# EAGLE board panel (EAGLE 6.3)
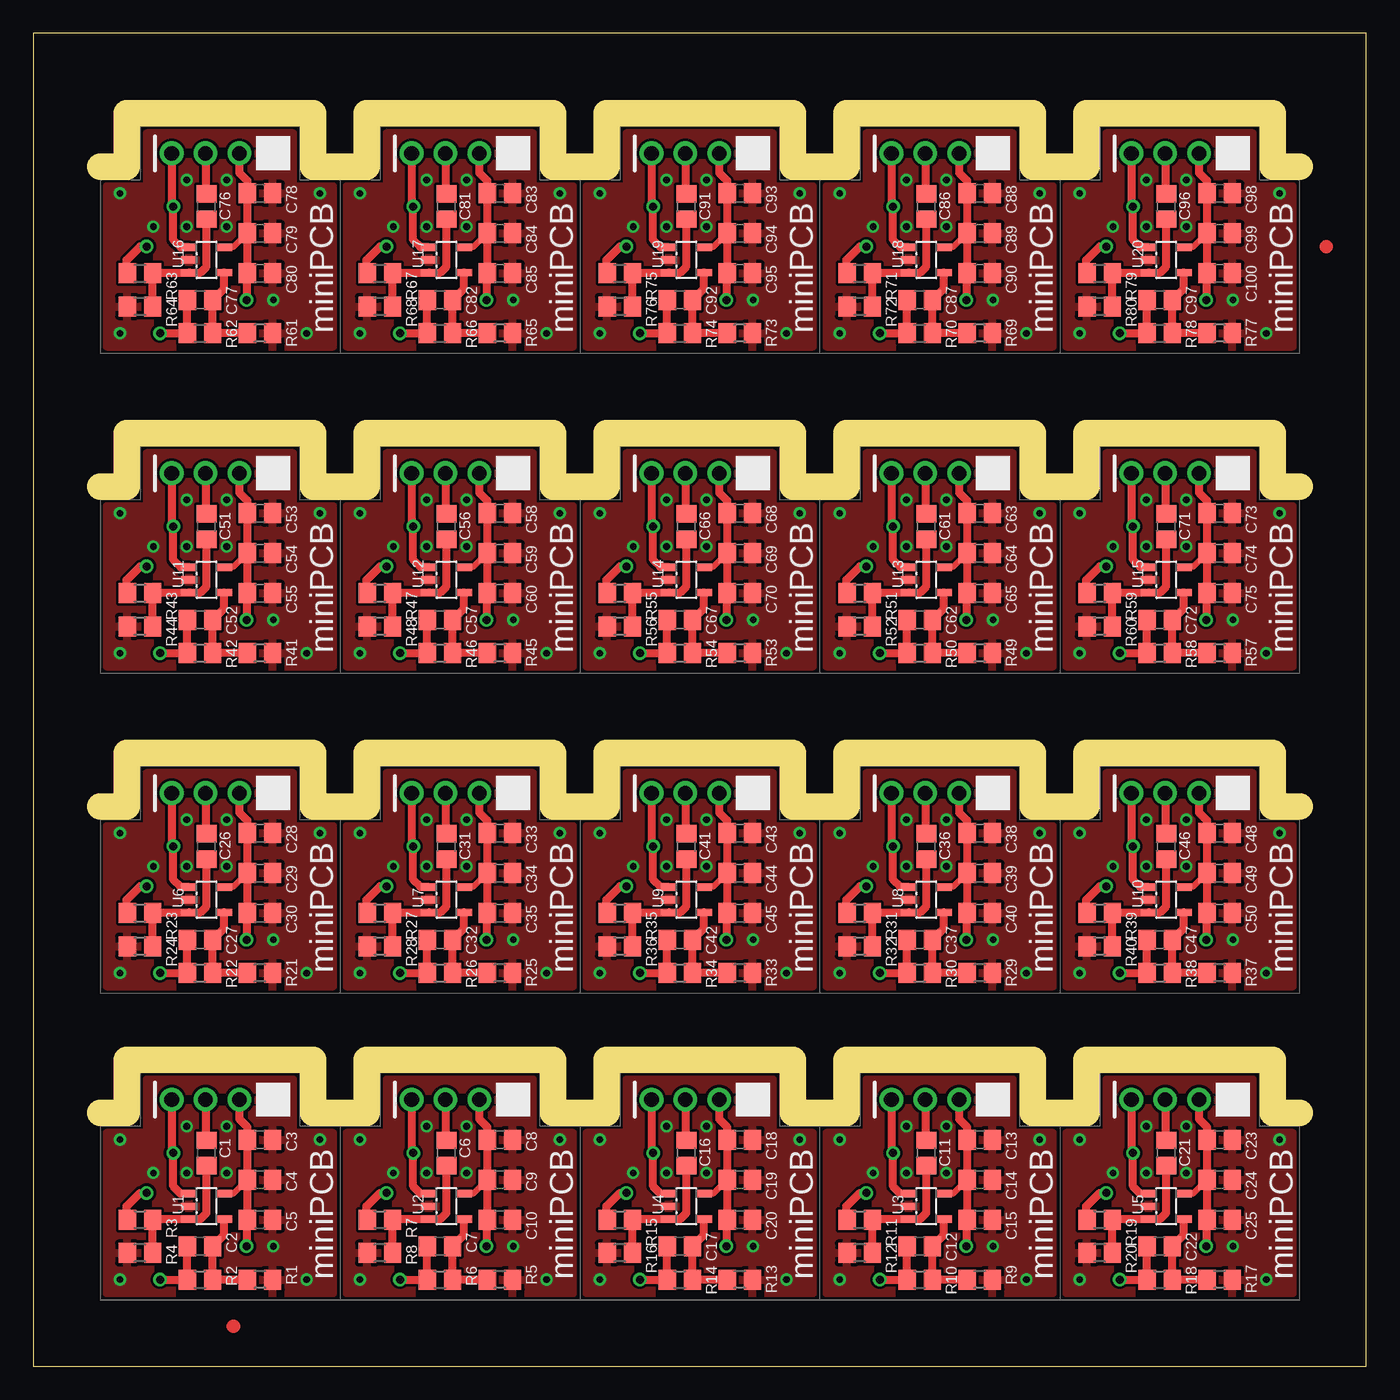
[diagram p0: board, top side]
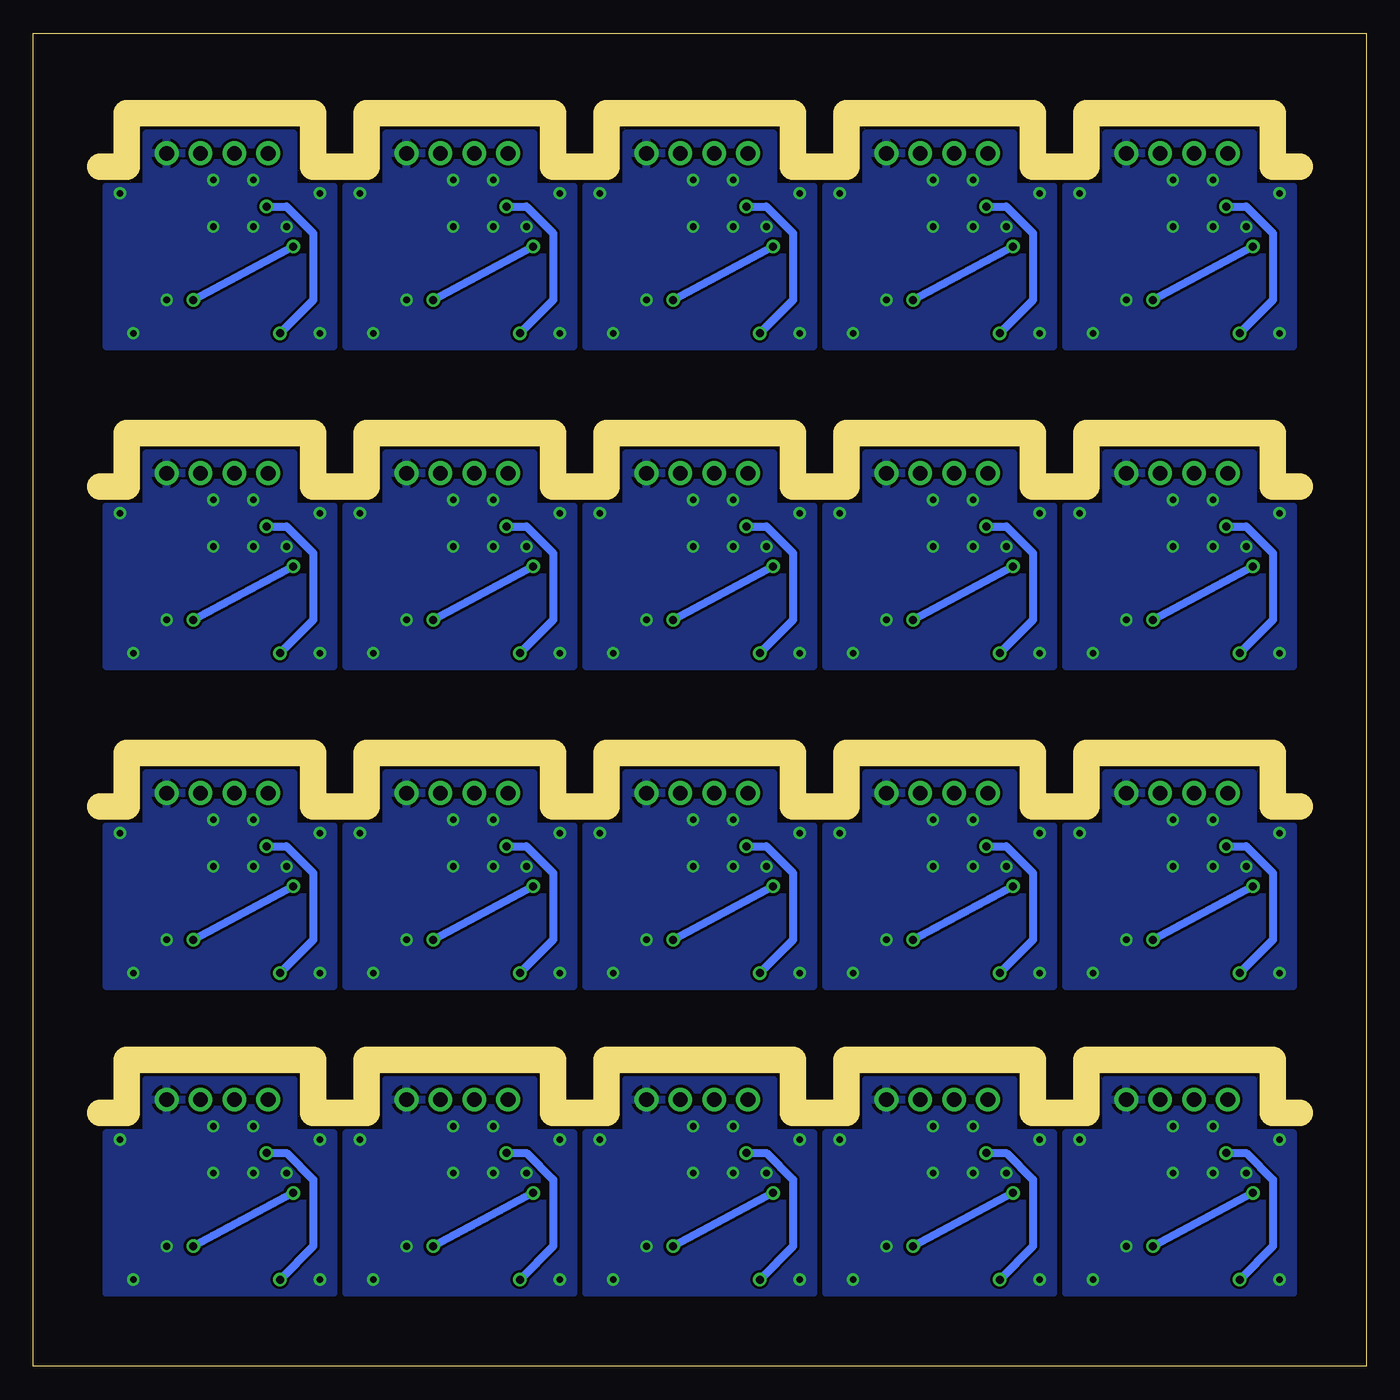
[diagram p1: board, bottom side, seen from below]

Size 100 x 100 mm. Coordinates in mm from the lower left corner, seen from the top.
Outline: 0,0 100,0 100,100 0,100 0,0
Copper layers (1*16): Top 0.035mm / dielectric 1.5mm / Bottom 0.035mm
Design rules "default *": minimum track width 10mil, minimum drill 24mil, track to track 8mil, track to pad 8mil, pad to pad 8mil, via to via 8mil, smd to smd 8mil, copper to edge 40mil, drill to drill 8mil, minimum pad ring 10mil, minimum via ring 8mil, stop-mask expansion 4mil, vias tented up to drill 20mil, thermal gap 10mil
Milling: 100 lines

## Footprints (pad centres in the part's own frame; a part is rotated, then mirrored left to right if it is on the bottom)
C0805 = smd 1.3 x 1.5: 1 -0.95,0; 2 0.95,0
FIDUCIAL = smd 0 x 0: FIDUCIAL 0,0
PCB_4 = drill 1.1 pad 1.778: P$1 0,0; P$2 0,-2.54; P$3 0,-5.08; P$4 0,-7.62
R0805 = smd 1.3 x 1.5: 1 -0.95,0; 2 0.95,0
SOT23-5 = smd 0.55 x 1.2: 1 -0.95,-1.3; 2 0,-1.3; 3 0.95,-1.3; 4 0.95,1.3; 5 -0.95,1.3

## Placement (x,y rotation side)
C1  [C0805]  13,16 270 top
C2  [C0805]  12.5,9 0 top
C3  [C0805]  17,17 180 top
C4  [C0805]  17,14 180 top
C5  [C0805]  17,11 180 top
C6  [C0805]  31,16 270 top
C7  [C0805]  30.5,9 0 top
C8  [C0805]  35,17 180 top
C9  [C0805]  35,14 180 top
C10  [C0805]  35,11 180 top
C11  [C0805]  67,16 270 top
C12  [C0805]  66.5,9 0 top
C13  [C0805]  71,17 180 top
C14  [C0805]  71,14 180 top
C15  [C0805]  71,11 180 top
C16  [C0805]  49,16 270 top
C17  [C0805]  48.5,9 0 top
C18  [C0805]  53,17 180 top
C19  [C0805]  53,14 180 top
C20  [C0805]  53,11 180 top
C21  [C0805]  85,16 270 top
C22  [C0805]  84.5,9 0 top
C23  [C0805]  89,17 180 top
C24  [C0805]  89,14 180 top
C25  [C0805]  89,11 180 top
C26  [C0805]  13,39 270 top
C27  [C0805]  12.5,32 0 top
C28  [C0805]  17,40 180 top
C29  [C0805]  17,37 180 top
C30  [C0805]  17,34 180 top
C31  [C0805]  31,39 270 top
C32  [C0805]  30.5,32 0 top
C33  [C0805]  35,40 180 top
C34  [C0805]  35,37 180 top
C35  [C0805]  35,34 180 top
C36  [C0805]  67,39 270 top
C37  [C0805]  66.5,32 0 top
C38  [C0805]  71,40 180 top
C39  [C0805]  71,37 180 top
C40  [C0805]  71,34 180 top
C41  [C0805]  49,39 270 top
C42  [C0805]  48.5,32 0 top
C43  [C0805]  53,40 180 top
C44  [C0805]  53,37 180 top
C45  [C0805]  53,34 180 top
C46  [C0805]  85,39 270 top
C47  [C0805]  84.5,32 0 top
C48  [C0805]  89,40 180 top
C49  [C0805]  89,37 180 top
C50  [C0805]  89,34 180 top
C51  [C0805]  13,63 270 top
C52  [C0805]  12.5,56 0 top
C53  [C0805]  17,64 180 top
C54  [C0805]  17,61 180 top
C55  [C0805]  17,58 180 top
C56  [C0805]  31,63 270 top
C57  [C0805]  30.5,56 0 top
C58  [C0805]  35,64 180 top
C59  [C0805]  35,61 180 top
C60  [C0805]  35,58 180 top
C61  [C0805]  67,63 270 top
C62  [C0805]  66.5,56 0 top
C63  [C0805]  71,64 180 top
C64  [C0805]  71,61 180 top
C65  [C0805]  71,58 180 top
C66  [C0805]  49,63 270 top
C67  [C0805]  48.5,56 0 top
C68  [C0805]  53,64 180 top
C69  [C0805]  53,61 180 top
C70  [C0805]  53,58 180 top
C71  [C0805]  85,63 270 top
C72  [C0805]  84.5,56 0 top
C73  [C0805]  89,64 180 top
C74  [C0805]  89,61 180 top
C75  [C0805]  89,58 180 top
C76  [C0805]  13,87 270 top
C77  [C0805]  12.5,80 0 top
C78  [C0805]  17,88 180 top
C79  [C0805]  17,85 180 top
C80  [C0805]  17,82 180 top
C81  [C0805]  31,87 270 top
C82  [C0805]  30.5,80 0 top
C83  [C0805]  35,88 180 top
C84  [C0805]  35,85 180 top
C85  [C0805]  35,82 180 top
C86  [C0805]  67,87 270 top
C87  [C0805]  66.5,80 0 top
C88  [C0805]  71,88 180 top
C89  [C0805]  71,85 180 top
C90  [C0805]  71,82 180 top
C91  [C0805]  49,87 270 top
C92  [C0805]  48.5,80 0 top
C93  [C0805]  53,88 180 top
C94  [C0805]  53,85 180 top
C95  [C0805]  53,82 180 top
C96  [C0805]  85,87 270 top
C97  [C0805]  84.5,80 0 top
C98  [C0805]  89,88 180 top
C99  [C0805]  89,85 180 top
C100  [C0805]  89,82 180 top
E$1  [FIDUCIAL]  15,3 0 top
E$2  [FIDUCIAL]  97,84 0 top
J1  PINS_4SILK  [PCB_4]  18,20 270 top
J2  PINS_4SILK  [PCB_4]  36,20 270 top
J3  PINS_4SILK  [PCB_4]  72,20 270 top
J4  PINS_4SILK  [PCB_4]  54,20 270 top
J5  PINS_4SILK  [PCB_4]  90,20 270 top
J6  PINS_4SILK  [PCB_4]  18,43 270 top
J7  PINS_4SILK  [PCB_4]  36,43 270 top
J8  PINS_4SILK  [PCB_4]  72,43 270 top
J9  PINS_4SILK  [PCB_4]  54,43 270 top
J10  PINS_4SILK  [PCB_4]  90,43 270 top
J11  PINS_4SILK  [PCB_4]  18,67 270 top
J12  PINS_4SILK  [PCB_4]  36,67 270 top
J13  PINS_4SILK  [PCB_4]  72,67 270 top
J14  PINS_4SILK  [PCB_4]  54,67 270 top
J15  PINS_4SILK  [PCB_4]  90,67 270 top
J16  PINS_4SILK  [PCB_4]  18,91 270 top
J17  PINS_4SILK  [PCB_4]  36,91 270 top
J18  PINS_4SILK  [PCB_4]  72,91 270 top
J19  PINS_4SILK  [PCB_4]  54,91 270 top
J20  PINS_4SILK  [PCB_4]  90,91 270 top
R1  [R0805]  17,6.5 180 top
R2  [R0805]  12.5,6.5 0 top
R3  [R0805]  8,11 0 top
R4  [R0805]  8,8.5 180 top
R5  [R0805]  35,6.5 180 top
R6  [R0805]  30.5,6.5 0 top
R7  [R0805]  26,11 0 top
R8  [R0805]  26,8.5 180 top
R9  [R0805]  71,6.5 180 top
R10  [R0805]  66.5,6.5 0 top
R11  [R0805]  62,11 0 top
R12  [R0805]  62,8.5 180 top
R13  [R0805]  53,6.5 180 top
R14  [R0805]  48.5,6.5 0 top
R15  [R0805]  44,11 0 top
R16  [R0805]  44,8.5 180 top
R17  [R0805]  89,6.5 180 top
R18  [R0805]  84.5,6.5 0 top
R19  [R0805]  80,11 0 top
R20  [R0805]  80,8.5 180 top
R21  [R0805]  17,29.5 180 top
R22  [R0805]  12.5,29.5 0 top
R23  [R0805]  8,34 0 top
R24  [R0805]  8,31.5 180 top
R25  [R0805]  35,29.5 180 top
R26  [R0805]  30.5,29.5 0 top
R27  [R0805]  26,34 0 top
R28  [R0805]  26,31.5 180 top
R29  [R0805]  71,29.5 180 top
R30  [R0805]  66.5,29.5 0 top
R31  [R0805]  62,34 0 top
R32  [R0805]  62,31.5 180 top
R33  [R0805]  53,29.5 180 top
R34  [R0805]  48.5,29.5 0 top
R35  [R0805]  44,34 0 top
R36  [R0805]  44,31.5 180 top
R37  [R0805]  89,29.5 180 top
R38  [R0805]  84.5,29.5 0 top
R39  [R0805]  80,34 0 top
R40  [R0805]  80,31.5 180 top
R41  [R0805]  17,53.5 180 top
R42  [R0805]  12.5,53.5 0 top
R43  [R0805]  8,58 0 top
R44  [R0805]  8,55.5 180 top
R45  [R0805]  35,53.5 180 top
R46  [R0805]  30.5,53.5 0 top
R47  [R0805]  26,58 0 top
R48  [R0805]  26,55.5 180 top
R49  [R0805]  71,53.5 180 top
R50  [R0805]  66.5,53.5 0 top
R51  [R0805]  62,58 0 top
R52  [R0805]  62,55.5 180 top
R53  [R0805]  53,53.5 180 top
R54  [R0805]  48.5,53.5 0 top
R55  [R0805]  44,58 0 top
R56  [R0805]  44,55.5 180 top
R57  [R0805]  89,53.5 180 top
R58  [R0805]  84.5,53.5 0 top
R59  [R0805]  80,58 0 top
R60  [R0805]  80,55.5 180 top
R61  [R0805]  17,77.5 180 top
R62  [R0805]  12.5,77.5 0 top
R63  [R0805]  8,82 0 top
R64  [R0805]  8,79.5 180 top
R65  [R0805]  35,77.5 180 top
R66  [R0805]  30.5,77.5 0 top
R67  [R0805]  26,82 0 top
R68  [R0805]  26,79.5 180 top
R69  [R0805]  71,77.5 180 top
R70  [R0805]  66.5,77.5 0 top
R71  [R0805]  62,82 0 top
R72  [R0805]  62,79.5 180 top
R73  [R0805]  53,77.5 180 top
R74  [R0805]  48.5,77.5 0 top
R75  [R0805]  44,82 0 top
R76  [R0805]  44,79.5 180 top
R77  [R0805]  89,77.5 180 top
R78  [R0805]  84.5,77.5 0 top
R79  [R0805]  80,82 0 top
R80  [R0805]  80,79.5 180 top
U1  LMH6629/DBV  [SOT23-5]  13,12 270 top
U2  LMH6629/DBV  [SOT23-5]  31,12 270 top
U3  LMH6629/DBV  [SOT23-5]  67,12 270 top
U4  LMH6629/DBV  [SOT23-5]  49,12 270 top
U5  LMH6629/DBV  [SOT23-5]  85,12 270 top
U6  LMH6629/DBV  [SOT23-5]  13,35 270 top
U7  LMH6629/DBV  [SOT23-5]  31,35 270 top
U8  LMH6629/DBV  [SOT23-5]  67,35 270 top
U9  LMH6629/DBV  [SOT23-5]  49,35 270 top
U10  LMH6629/DBV  [SOT23-5]  85,35 270 top
U11  LMH6629/DBV  [SOT23-5]  13,59 270 top
U12  LMH6629/DBV  [SOT23-5]  31,59 270 top
U13  LMH6629/DBV  [SOT23-5]  67,59 270 top
U14  LMH6629/DBV  [SOT23-5]  49,59 270 top
U15  LMH6629/DBV  [SOT23-5]  85,59 270 top
U16  LMH6629/DBV  [SOT23-5]  13,83 270 top
U17  LMH6629/DBV  [SOT23-5]  31,83 270 top
U18  LMH6629/DBV  [SOT23-5]  67,83 270 top
U19  LMH6629/DBV  [SOT23-5]  49,83 270 top
U20  LMH6629/DBV  [SOT23-5]  85,83 270 top

## Library data of the parts
C1-C100 E$1 E$2 J1-J20 R1-R80 U1-U20 = nolan-utsa

## Nets
GND: C3.1 C4.1 C5.1 J1.P$1 R1.1 R4.2 U1.2
GND1: C8.1 C9.1 C10.1 J2.P$1 R5.1 R8.2 U2.2
GND2: C13.1 C14.1 C15.1 J3.P$1 R9.1 R12.2 U3.2
GND3: C18.1 C19.1 C20.1 J4.P$1 R13.1 R16.2 U4.2
GND4: C23.1 C24.1 C25.1 J5.P$1 R17.1 R20.2 U5.2
GND5: C28.1 C29.1 C30.1 J6.P$1 R21.1 R24.2 U6.2
GND6: C33.1 C34.1 C35.1 J7.P$1 R25.1 R28.2 U7.2
GND7: C38.1 C39.1 C40.1 J8.P$1 R29.1 R32.2 U8.2
GND8: C43.1 C44.1 C45.1 J9.P$1 R33.1 R36.2 U9.2
GND9: C48.1 C49.1 C50.1 J10.P$1 R37.1 R40.2 U10.2
GND10: C53.1 C54.1 C55.1 J11.P$1 R41.1 R44.2 U11.2
GND11: C58.1 C59.1 C60.1 J12.P$1 R45.1 R48.2 U12.2
GND12: C63.1 C64.1 C65.1 J13.P$1 R49.1 R52.2 U13.2
GND13: C68.1 C69.1 C70.1 J14.P$1 R53.1 R56.2 U14.2
GND14: C73.1 C74.1 C75.1 J15.P$1 R57.1 R60.2 U15.2
GND15: C78.1 C79.1 C80.1 J16.P$1 R61.1 R64.2 U16.2
GND16: C83.1 C84.1 C85.1 J17.P$1 R65.1 R68.2 U17.2
GND17: C88.1 C89.1 C90.1 J18.P$1 R69.1 R72.2 U18.2
GND18: C93.1 C94.1 C95.1 J19.P$1 R73.1 R76.2 U19.2
GND19: C98.1 C99.1 C100.1 J20.P$1 R77.1 R80.2 U20.2
IN: C1.1 J1.P$3
IN1: C6.1 J2.P$3
IN2: C11.1 J3.P$3
IN3: C16.1 J4.P$3
IN4: C21.1 J5.P$3
IN5: C26.1 J6.P$3
IN6: C31.1 J7.P$3
IN7: C36.1 J8.P$3
IN8: C41.1 J9.P$3
IN9: C46.1 J10.P$3
IN10: C51.1 J11.P$3
IN11: C56.1 J12.P$3
IN12: C61.1 J13.P$3
IN13: C66.1 J14.P$3
IN14: C71.1 J15.P$3
IN15: C76.1 J16.P$3
IN16: C81.1 J17.P$3
IN17: C86.1 J18.P$3
IN18: C91.1 J19.P$3
IN19: C96.1 J20.P$3
N$1: C1.2 R3.2 R4.1 U1.3
N$2: C2.2 R1.2 R2.2 U1.4
N$3: C6.2 R7.2 R8.1 U2.3
N$4: C7.2 R5.2 R6.2 U2.4
N$5: C11.2 R11.2 R12.1 U3.3
N$6: C12.2 R9.2 R10.2 U3.4
N$7: C16.2 R15.2 R16.1 U4.3
N$8: C17.2 R13.2 R14.2 U4.4
N$9: C21.2 R19.2 R20.1 U5.3
N$10: C22.2 R17.2 R18.2 U5.4
N$11: C26.2 R23.2 R24.1 U6.3
N$12: C27.2 R21.2 R22.2 U6.4
N$13: C31.2 R27.2 R28.1 U7.3
N$14: C32.2 R25.2 R26.2 U7.4
N$15: C36.2 R31.2 R32.1 U8.3
N$16: C37.2 R29.2 R30.2 U8.4
N$17: C41.2 R35.2 R36.1 U9.3
N$18: C42.2 R33.2 R34.2 U9.4
N$19: C46.2 R39.2 R40.1 U10.3
N$20: C47.2 R37.2 R38.2 U10.4
N$21: C51.2 R43.2 R44.1 U11.3
N$22: C52.2 R41.2 R42.2 U11.4
N$23: C56.2 R47.2 R48.1 U12.3
N$24: C57.2 R45.2 R46.2 U12.4
N$25: C61.2 R51.2 R52.1 U13.3
N$26: C62.2 R49.2 R50.2 U13.4
N$27: C66.2 R55.2 R56.1 U14.3
N$28: C67.2 R53.2 R54.2 U14.4
N$29: C71.2 R59.2 R60.1 U15.3
N$30: C72.2 R57.2 R58.2 U15.4
N$31: C76.2 R63.2 R64.1 U16.3
N$32: C77.2 R61.2 R62.2 U16.4
N$33: C81.2 R67.2 R68.1 U17.3
N$34: C82.2 R65.2 R66.2 U17.4
N$35: C86.2 R71.2 R72.1 U18.3
N$36: C87.2 R69.2 R70.2 U18.4
N$37: C91.2 R75.2 R76.1 U19.3
N$38: C92.2 R73.2 R74.2 U19.4
N$39: C96.2 R79.2 R80.1 U20.3
N$40: C97.2 R77.2 R78.2 U20.4
OUT: C2.1 J1.P$4 R2.1 U1.1
OUT1: C7.1 J2.P$4 R6.1 U2.1
OUT2: C12.1 J3.P$4 R10.1 U3.1
OUT3: C17.1 J4.P$4 R14.1 U4.1
OUT4: C22.1 J5.P$4 R18.1 U5.1
OUT5: C27.1 J6.P$4 R22.1 U6.1
OUT6: C32.1 J7.P$4 R26.1 U7.1
OUT7: C37.1 J8.P$4 R30.1 U8.1
OUT8: C42.1 J9.P$4 R34.1 U9.1
OUT9: C47.1 J10.P$4 R38.1 U10.1
OUT10: C52.1 J11.P$4 R42.1 U11.1
OUT11: C57.1 J12.P$4 R46.1 U12.1
OUT12: C62.1 J13.P$4 R50.1 U13.1
OUT13: C67.1 J14.P$4 R54.1 U14.1
OUT14: C72.1 J15.P$4 R58.1 U15.1
OUT15: C77.1 J16.P$4 R62.1 U16.1
OUT16: C82.1 J17.P$4 R66.1 U17.1
OUT17: C87.1 J18.P$4 R70.1 U18.1
OUT18: C92.1 J19.P$4 R74.1 U19.1
OUT19: C97.1 J20.P$4 R78.1 U20.1
PWR: C3.2 C4.2 C5.2 J1.P$2 R3.1 U1.5
PWR1: C8.2 C9.2 C10.2 J2.P$2 R7.1 U2.5
PWR2: C13.2 C14.2 C15.2 J3.P$2 R11.1 U3.5
PWR3: C18.2 C19.2 C20.2 J4.P$2 R15.1 U4.5
PWR4: C23.2 C24.2 C25.2 J5.P$2 R19.1 U5.5
PWR5: C28.2 C29.2 C30.2 J6.P$2 R23.1 U6.5
PWR6: C33.2 C34.2 C35.2 J7.P$2 R27.1 U7.5
PWR7: C38.2 C39.2 C40.2 J8.P$2 R31.1 U8.5
PWR8: C43.2 C44.2 C45.2 J9.P$2 R35.1 U9.5
PWR9: C48.2 C49.2 C50.2 J10.P$2 R39.1 U10.5
PWR10: C53.2 C54.2 C55.2 J11.P$2 R43.1 U11.5
PWR11: C58.2 C59.2 C60.2 J12.P$2 R47.1 U12.5
PWR12: C63.2 C64.2 C65.2 J13.P$2 R51.1 U13.5
PWR13: C68.2 C69.2 C70.2 J14.P$2 R55.1 U14.5
PWR14: C73.2 C74.2 C75.2 J15.P$2 R59.1 U15.5
PWR15: C78.2 C79.2 C80.2 J16.P$2 R63.1 U16.5
PWR16: C83.2 C84.2 C85.2 J17.P$2 R67.1 U17.5
PWR17: C88.2 C89.2 C90.2 J18.P$2 R71.1 U18.5
PWR18: C93.2 C94.2 C95.2 J19.P$2 R75.1 U19.5
PWR19: C98.2 C99.2 C100.2 J20.P$2 R79.1 U20.5

## Tracks (layer width: path | path; a pad name or v marks a point on that pad's centre or on a via)
GND  (via drill 0.5)
  other vias: 6.5,17 6.5,6.5 20.5,6.5 18,9 14.5,18 11.5,18 21.5,17 11.5,14.5 14.5,14.5 9,14.5
  pour Bottom: 5.5,5.5 22.5,5.5 22.5,17.5 19.5,17.5 19.5,21.5 8.5,21.5 8.5,17.5 5.5,17.5
  pour Top: 5.5,5.5 22.5,5.5 22.5,17.5 19.5,17.5 19.5,21.5 8.5,21.5 8.5,17.5 5.5,17.5
GND1  (via drill 0.5)
  other vias: 24.5,17 24.5,6.5 38.5,6.5 36,9 32.5,18 29.5,18 39.5,17 29.5,14.5 32.5,14.5 27,14.5
  pour Bottom: 23.5,5.5 40.5,5.5 40.5,17.5 37.5,17.5 37.5,21.5 26.5,21.5 26.5,17.5 23.5,17.5
  pour Top: 23.5,5.5 40.5,5.5 40.5,17.5 37.5,17.5 37.5,21.5 26.5,21.5 26.5,17.5 23.5,17.5
GND2  (via drill 0.5)
  other vias: 60.5,17 60.5,6.5 74.5,6.5 72,9 68.5,18 65.5,18 75.5,17 65.5,14.5 68.5,14.5 63,14.5
  pour Bottom: 59.5,5.5 76.5,5.5 76.5,17.5 73.5,17.5 73.5,21.5 62.5,21.5 62.5,17.5 59.5,17.5
  pour Top: 59.5,5.5 76.5,5.5 76.5,17.5 73.5,17.5 73.5,21.5 62.5,21.5 62.5,17.5 59.5,17.5
GND3  (via drill 0.5)
  other vias: 42.5,17 42.5,6.5 56.5,6.5 54,9 50.5,18 47.5,18 57.5,17 47.5,14.5 50.5,14.5 45,14.5
  pour Bottom: 41.5,5.5 58.5,5.5 58.5,17.5 55.5,17.5 55.5,21.5 44.5,21.5 44.5,17.5 41.5,17.5
  pour Top: 41.5,5.5 58.5,5.5 58.5,17.5 55.5,17.5 55.5,21.5 44.5,21.5 44.5,17.5 41.5,17.5
GND4  (via drill 0.5)
  other vias: 78.5,17 78.5,6.5 92.5,6.5 90,9 86.5,18 83.5,18 93.5,17 83.5,14.5 86.5,14.5 81,14.5
  pour Bottom: 77.5,5.5 94.5,5.5 94.5,17.5 91.5,17.5 91.5,21.5 80.5,21.5 80.5,17.5 77.5,17.5
  pour Top: 77.5,5.5 94.5,5.5 94.5,17.5 91.5,17.5 91.5,21.5 80.5,21.5 80.5,17.5 77.5,17.5
GND5  (via drill 0.5)
  other vias: 6.5,40 6.5,29.5 20.5,29.5 18,32 14.5,41 11.5,41 21.5,40 11.5,37.5 14.5,37.5 9,37.5
  pour Bottom: 5.5,28.5 22.5,28.5 22.5,40.5 19.5,40.5 19.5,44.5 8.5,44.5 8.5,40.5 5.5,40.5
  pour Top: 5.5,28.5 22.5,28.5 22.5,40.5 19.5,40.5 19.5,44.5 8.5,44.5 8.5,40.5 5.5,40.5
GND6  (via drill 0.5)
  other vias: 24.5,40 24.5,29.5 38.5,29.5 36,32 32.5,41 29.5,41 39.5,40 29.5,37.5 32.5,37.5 27,37.5
  pour Bottom: 23.5,28.5 40.5,28.5 40.5,40.5 37.5,40.5 37.5,44.5 26.5,44.5 26.5,40.5 23.5,40.5
  pour Top: 23.5,28.5 40.5,28.5 40.5,40.5 37.5,40.5 37.5,44.5 26.5,44.5 26.5,40.5 23.5,40.5
GND7  (via drill 0.5)
  other vias: 60.5,40 60.5,29.5 74.5,29.5 72,32 68.5,41 65.5,41 75.5,40 65.5,37.5 68.5,37.5 63,37.5
  pour Bottom: 59.5,28.5 76.5,28.5 76.5,40.5 73.5,40.5 73.5,44.5 62.5,44.5 62.5,40.5 59.5,40.5
  pour Top: 59.5,28.5 76.5,28.5 76.5,40.5 73.5,40.5 73.5,44.5 62.5,44.5 62.5,40.5 59.5,40.5
GND8  (via drill 0.5)
  other vias: 42.5,40 42.5,29.5 56.5,29.5 54,32 50.5,41 47.5,41 57.5,40 47.5,37.5 50.5,37.5 45,37.5
  pour Bottom: 41.5,28.5 58.5,28.5 58.5,40.5 55.5,40.5 55.5,44.5 44.5,44.5 44.5,40.5 41.5,40.5
  pour Top: 41.5,28.5 58.5,28.5 58.5,40.5 55.5,40.5 55.5,44.5 44.5,44.5 44.5,40.5 41.5,40.5
GND9  (via drill 0.5)
  other vias: 78.5,40 78.5,29.5 92.5,29.5 90,32 86.5,41 83.5,41 93.5,40 83.5,37.5 86.5,37.5 81,37.5
  pour Bottom: 77.5,28.5 94.5,28.5 94.5,40.5 91.5,40.5 91.5,44.5 80.5,44.5 80.5,40.5 77.5,40.5
  pour Top: 77.5,28.5 94.5,28.5 94.5,40.5 91.5,40.5 91.5,44.5 80.5,44.5 80.5,40.5 77.5,40.5
GND10  (via drill 0.5)
  other vias: 6.5,64 6.5,53.5 20.5,53.5 18,56 14.5,65 11.5,65 21.5,64 11.5,61.5 14.5,61.5 9,61.5
  pour Bottom: 5.5,52.5 22.5,52.5 22.5,64.5 19.5,64.5 19.5,68.5 8.5,68.5 8.5,64.5 5.5,64.5
  pour Top: 5.5,52.5 22.5,52.5 22.5,64.5 19.5,64.5 19.5,68.5 8.5,68.5 8.5,64.5 5.5,64.5
GND11  (via drill 0.5)
  other vias: 24.5,64 24.5,53.5 38.5,53.5 36,56 32.5,65 29.5,65 39.5,64 29.5,61.5 32.5,61.5 27,61.5
  pour Bottom: 23.5,52.5 40.5,52.5 40.5,64.5 37.5,64.5 37.5,68.5 26.5,68.5 26.5,64.5 23.5,64.5
  pour Top: 23.5,52.5 40.5,52.5 40.5,64.5 37.5,64.5 37.5,68.5 26.5,68.5 26.5,64.5 23.5,64.5
GND12  (via drill 0.5)
  other vias: 60.5,64 60.5,53.5 74.5,53.5 72,56 68.5,65 65.5,65 75.5,64 65.5,61.5 68.5,61.5 63,61.5
  pour Bottom: 59.5,52.5 76.5,52.5 76.5,64.5 73.5,64.5 73.5,68.5 62.5,68.5 62.5,64.5 59.5,64.5
  pour Top: 59.5,52.5 76.5,52.5 76.5,64.5 73.5,64.5 73.5,68.5 62.5,68.5 62.5,64.5 59.5,64.5
GND13  (via drill 0.5)
  other vias: 42.5,64 42.5,53.5 56.5,53.5 54,56 50.5,65 47.5,65 57.5,64 47.5,61.5 50.5,61.5 45,61.5
  pour Bottom: 41.5,52.5 58.5,52.5 58.5,64.5 55.5,64.5 55.5,68.5 44.5,68.5 44.5,64.5 41.5,64.5
  pour Top: 41.5,52.5 58.5,52.5 58.5,64.5 55.5,64.5 55.5,68.5 44.5,68.5 44.5,64.5 41.5,64.5
GND14  (via drill 0.5)
  other vias: 78.5,64 78.5,53.5 92.5,53.5 90,56 86.5,65 83.5,65 93.5,64 83.5,61.5 86.5,61.5 81,61.5
  pour Bottom: 77.5,52.5 94.5,52.5 94.5,64.5 91.5,64.5 91.5,68.5 80.5,68.5 80.5,64.5 77.5,64.5
  pour Top: 77.5,52.5 94.5,52.5 94.5,64.5 91.5,64.5 91.5,68.5 80.5,68.5 80.5,64.5 77.5,64.5
GND15  (via drill 0.5)
  other vias: 6.5,88 6.5,77.5 20.5,77.5 18,80 14.5,89 11.5,89 21.5,88 11.5,85.5 14.5,85.5 9,85.5
  pour Bottom: 5.5,76.5 22.5,76.5 22.5,88.5 19.5,88.5 19.5,92.5 8.5,92.5 8.5,88.5 5.5,88.5
  pour Top: 5.5,76.5 22.5,76.5 22.5,88.5 19.5,88.5 19.5,92.5 8.5,92.5 8.5,88.5 5.5,88.5
GND16  (via drill 0.5)
  other vias: 24.5,88 24.5,77.5 38.5,77.5 36,80 32.5,89 29.5,89 39.5,88 29.5,85.5 32.5,85.5 27,85.5
  pour Bottom: 23.5,76.5 40.5,76.5 40.5,88.5 37.5,88.5 37.5,92.5 26.5,92.5 26.5,88.5 23.5,88.5
  pour Top: 23.5,76.5 40.5,76.5 40.5,88.5 37.5,88.5 37.5,92.5 26.5,92.5 26.5,88.5 23.5,88.5
GND17  (via drill 0.5)
  other vias: 60.5,88 60.5,77.5 74.5,77.5 72,80 68.5,89 65.5,89 75.5,88 65.5,85.5 68.5,85.5 63,85.5
  pour Bottom: 59.5,76.5 76.5,76.5 76.5,88.5 73.5,88.5 73.5,92.5 62.5,92.5 62.5,88.5 59.5,88.5
  pour Top: 59.5,76.5 76.5,76.5 76.5,88.5 73.5,88.5 73.5,92.5 62.5,92.5 62.5,88.5 59.5,88.5
GND18  (via drill 0.5)
  other vias: 42.5,88 42.5,77.5 56.5,77.5 54,80 50.5,89 47.5,89 57.5,88 47.5,85.5 50.5,85.5 45,85.5
  pour Bottom: 41.5,76.5 58.5,76.5 58.5,88.5 55.5,88.5 55.5,92.5 44.5,92.5 44.5,88.5 41.5,88.5
  pour Top: 41.5,76.5 58.5,76.5 58.5,88.5 55.5,88.5 55.5,92.5 44.5,92.5 44.5,88.5 41.5,88.5
GND19  (via drill 0.5)
  other vias: 78.5,88 78.5,77.5 92.5,77.5 90,80 86.5,89 83.5,89 93.5,88 83.5,85.5 86.5,85.5 81,85.5
  pour Bottom: 77.5,76.5 94.5,76.5 94.5,88.5 91.5,88.5 91.5,92.5 80.5,92.5 80.5,88.5 77.5,88.5
  pour Top: 77.5,76.5 94.5,76.5 94.5,88.5 91.5,88.5 91.5,92.5 80.5,92.5 80.5,88.5 77.5,88.5
IN
  Top 0.61: J1.P$3 12.92,17.03 C1.1
IN1
  Top 0.61: J2.P$3 30.92,17.03 C6.1
IN2
  Top 0.61: J3.P$3 66.92,17.03 C11.1
IN3
  Top 0.61: J4.P$3 48.92,17.03 C16.1
IN4
  Top 0.61: J5.P$3 84.92,17.03 C21.1
IN5
  Top 0.61: J6.P$3 12.92,40.03 C26.1
IN6
  Top 0.61: J7.P$3 30.92,40.03 C31.1
IN7
  Top 0.61: J8.P$3 66.92,40.03 C36.1
IN8
  Top 0.61: J9.P$3 48.92,40.03 C41.1
IN9
  Top 0.61: J10.P$3 84.92,40.03 C46.1
IN10
  Top 0.61: J11.P$3 12.92,64.03 C51.1
IN11
  Top 0.61: J12.P$3 30.92,64.03 C56.1
IN12
  Top 0.61: J13.P$3 66.92,64.03 C61.1
IN13
  Top 0.61: J14.P$3 48.92,64.03 C66.1
IN14
  Top 0.61: J15.P$3 84.92,64.03 C71.1
IN15
  Top 0.61: J16.P$3 12.92,88.03 C76.1
IN16
  Top 0.61: J17.P$3 30.92,88.03 C81.1
IN17
  Top 0.61: J18.P$3 66.92,88.03 C86.1
IN18
  Top 0.61: J19.P$3 48.92,88.03 C91.1
IN19
  Top 0.61: J20.P$3 84.92,88.03 C96.1
N$1
  Top 0.61: R4.1 R3.2 9.05,11.1 9.1,11.05 U1.3 12.55,11.05 13,11.5 C1.2
N$2
  Top 0.61: R1.2 R2.2 C2.2 14.3,9.85 U1.4
N$3
  Top 0.61: R8.1 R7.2 27.05,11.1 27.1,11.05 U2.3 30.55,11.05 31,11.5 C6.2
N$4
  Top 0.61: R5.2 R6.2 C7.2 32.3,9.85 U2.4
N$5
  Top 0.61: R12.1 R11.2 63.05,11.1 63.1,11.05 U3.3 66.55,11.05 67,11.5 C11.2
N$6
  Top 0.61: R9.2 R10.2 C12.2 68.3,9.85 U3.4
N$7
  Top 0.61: R16.1 R15.2 45.05,11.1 45.1,11.05 U4.3 48.55,11.05 49,11.5 C16.2
N$8
  Top 0.61: R13.2 R14.2 C17.2 50.3,9.85 U4.4
N$9
  Top 0.61: R20.1 R19.2 81.05,11.1 81.1,11.05 U5.3 84.55,11.05 85,11.5 C21.2
N$10
  Top 0.61: R17.2 R18.2 C22.2 86.3,9.85 U5.4
N$11
  Top 0.61: R24.1 R23.2 9.05,34.1 9.1,34.05 U6.3 12.55,34.05 13,34.5 C26.2
N$12
  Top 0.61: R21.2 R22.2 C27.2 14.3,32.85 U6.4
N$13
  Top 0.61: R28.1 R27.2 27.05,34.1 27.1,34.05 U7.3 30.55,34.05 31,34.5 C31.2
N$14
  Top 0.61: R25.2 R26.2 C32.2 32.3,32.85 U7.4
N$15
  Top 0.61: R32.1 R31.2 63.05,34.1 63.1,34.05 U8.3 66.55,34.05 67,34.5 C36.2
N$16
  Top 0.61: R29.2 R30.2 C37.2 68.3,32.85 U8.4
N$17
  Top 0.61: R36.1 R35.2 45.05,34.1 45.1,34.05 U9.3 48.55,34.05 49,34.5 C41.2
N$18
  Top 0.61: R33.2 R34.2 C42.2 50.3,32.85 U9.4
N$19
  Top 0.61: R40.1 R39.2 81.05,34.1 81.1,34.05 U10.3 84.55,34.05 85,34.5 C46.2
N$20
  Top 0.61: R37.2 R38.2 C47.2 86.3,32.85 U10.4
N$21
  Top 0.61: R44.1 R43.2 9.05,58.1 9.1,58.05 U11.3 12.55,58.05 13,58.5 C51.2
N$22
  Top 0.61: R41.2 R42.2 C52.2 14.3,56.85 U11.4
N$23
  Top 0.61: R48.1 R47.2 27.05,58.1 27.1,58.05 U12.3 30.55,58.05 31,58.5 C56.2
N$24
  Top 0.61: R45.2 R46.2 C57.2 32.3,56.85 U12.4
N$25
  Top 0.61: R52.1 R51.2 63.05,58.1 63.1,58.05 U13.3 66.55,58.05 67,58.5 C61.2
N$26
  Top 0.61: R49.2 R50.2 C62.2 68.3,56.85 U13.4
N$27
  Top 0.61: R56.1 R55.2 45.05,58.1 45.1,58.05 U14.3 48.55,58.05 49,58.5 C66.2
N$28
  Top 0.61: R53.2 R54.2 C67.2 50.3,56.85 U14.4
N$29
  Top 0.61: R60.1 R59.2 81.05,58.1 81.1,58.05 U15.3 84.55,58.05 85,58.5 C71.2
N$30
  Top 0.61: R57.2 R58.2 C72.2 86.3,56.85 U15.4
N$31
  Top 0.61: R64.1 R63.2 9.05,82.1 9.1,82.05 U16.3 12.55,82.05 13,82.5 C76.2
N$32
  Top 0.61: R61.2 R62.2 C77.2 14.3,80.85 U16.4
N$33
  Top 0.61: R68.1 R67.2 27.05,82.1 27.1,82.05 U17.3 30.55,82.05 31,82.5 C81.2
N$34
  Top 0.61: R65.2 R66.2 C82.2 32.3,80.85 U17.4
N$35
  Top 0.61: R72.1 R71.2 63.05,82.1 63.1,82.05 U18.3 66.55,82.05 67,82.5 C86.2
N$36
  Top 0.61: R69.2 R70.2 C87.2 68.3,80.85 U18.4
N$37
  Top 0.61: R76.1 R75.2 45.05,82.1 45.1,82.05 U19.3 48.55,82.05 49,82.5 C91.2
N$38
  Top 0.61: R73.2 R74.2 C92.2 50.3,80.85 U19.4
N$39
  Top 0.61: R80.1 R79.2 81.05,82.1 81.1,82.05 U20.3 84.55,82.05 85,82.5 C96.2
N$40
  Top 0.61: R77.2 R78.2 C97.2 86.3,80.85 U20.4
OUT  (via drill 0.6)
  Top 0.61: C2.1 R2.1 v9.5,6.5 | J1.P$4 10.38,16.12 v10.5,16 10.5,13.5 11.05,12.95 U1.1
  Bottom 0.61: v10.5,16 9,16 7,14 7,9 v9.5,6.5
OUT1  (via drill 0.6)
  Top 0.61: C7.1 R6.1 v27.5,6.5 | J2.P$4 28.38,16.12 v28.5,16 28.5,13.5 29.05,12.95 U2.1
  Bottom 0.61: v28.5,16 27,16 25,14 25,9 v27.5,6.5
OUT2  (via drill 0.6)
  Top 0.61: C12.1 R10.1 v63.5,6.5 | J3.P$4 64.38,16.12 v64.5,16 64.5,13.5 65.05,12.95 U3.1
  Bottom 0.61: v64.5,16 63,16 61,14 61,9 v63.5,6.5
OUT3  (via drill 0.6)
  Top 0.61: C17.1 R14.1 v45.5,6.5 | J4.P$4 46.38,16.12 v46.5,16 46.5,13.5 47.05,12.95 U4.1
  Bottom 0.61: v46.5,16 45,16 43,14 43,9 v45.5,6.5
OUT4  (via drill 0.6)
  Top 0.61: C22.1 R18.1 v81.5,6.5 | J5.P$4 82.38,16.12 v82.5,16 82.5,13.5 83.05,12.95 U5.1
  Bottom 0.61: v82.5,16 81,16 79,14 79,9 v81.5,6.5
OUT5  (via drill 0.6)
  Top 0.61: C27.1 R22.1 v9.5,29.5 | J6.P$4 10.38,39.12 v10.5,39 10.5,36.5 11.05,35.95 U6.1
  Bottom 0.61: v10.5,39 9,39 7,37 7,32 v9.5,29.5
OUT6  (via drill 0.6)
  Top 0.61: C32.1 R26.1 v27.5,29.5 | J7.P$4 28.38,39.12 v28.5,39 28.5,36.5 29.05,35.95 U7.1
  Bottom 0.61: v28.5,39 27,39 25,37 25,32 v27.5,29.5
OUT7  (via drill 0.6)
  Top 0.61: C37.1 R30.1 v63.5,29.5 | J8.P$4 64.38,39.12 v64.5,39 64.5,36.5 65.05,35.95 U8.1
  Bottom 0.61: v64.5,39 63,39 61,37 61,32 v63.5,29.5
OUT8  (via drill 0.6)
  Top 0.61: C42.1 R34.1 v45.5,29.5 | J9.P$4 46.38,39.12 v46.5,39 46.5,36.5 47.05,35.95 U9.1
  Bottom 0.61: v46.5,39 45,39 43,37 43,32 v45.5,29.5
OUT9  (via drill 0.6)
  Top 0.61: C47.1 R38.1 v81.5,29.5 | J10.P$4 82.38,39.12 v82.5,39 82.5,36.5 83.05,35.95 U10.1
  Bottom 0.61: v82.5,39 81,39 79,37 79,32 v81.5,29.5
OUT10  (via drill 0.6)
  Top 0.61: C52.1 R42.1 v9.5,53.5 | J11.P$4 10.38,63.12 v10.5,63 10.5,60.5 11.05,59.95 U11.1
  Bottom 0.61: v10.5,63 9,63 7,61 7,56 v9.5,53.5
OUT11  (via drill 0.6)
  Top 0.61: C57.1 R46.1 v27.5,53.5 | J12.P$4 28.38,63.12 v28.5,63 28.5,60.5 29.05,59.95 U12.1
  Bottom 0.61: v28.5,63 27,63 25,61 25,56 v27.5,53.5
OUT12  (via drill 0.6)
  Top 0.61: C62.1 R50.1 v63.5,53.5 | J13.P$4 64.38,63.12 v64.5,63 64.5,60.5 65.05,59.95 U13.1
  Bottom 0.61: v64.5,63 63,63 61,61 61,56 v63.5,53.5
OUT13  (via drill 0.6)
  Top 0.61: C67.1 R54.1 v45.5,53.5 | J14.P$4 46.38,63.12 v46.5,63 46.5,60.5 47.05,59.95 U14.1
  Bottom 0.61: v46.5,63 45,63 43,61 43,56 v45.5,53.5
OUT14  (via drill 0.6)
  Top 0.61: C72.1 R58.1 v81.5,53.5 | J15.P$4 82.38,63.12 v82.5,63 82.5,60.5 83.05,59.95 U15.1
  Bottom 0.61: v82.5,63 81,63 79,61 79,56 v81.5,53.5
OUT15  (via drill 0.6)
  Top 0.61: C77.1 R62.1 v9.5,77.5 | J16.P$4 10.38,87.12 v10.5,87 10.5,84.5 11.05,83.95 U16.1
  Bottom 0.61: v10.5,87 9,87 7,85 7,80 v9.5,77.5
OUT16  (via drill 0.6)
  Top 0.61: C82.1 R66.1 v27.5,77.5 | J17.P$4 28.38,87.12 v28.5,87 28.5,84.5 29.05,83.95 U17.1
  Bottom 0.61: v28.5,87 27,87 25,85 25,80 v27.5,77.5
OUT17  (via drill 0.6)
  Top 0.61: C87.1 R70.1 v63.5,77.5 | J18.P$4 64.38,87.12 v64.5,87 64.5,84.5 65.05,83.95 U18.1
  Bottom 0.61: v64.5,87 63,87 61,85 61,80 v63.5,77.5
OUT18  (via drill 0.6)
  Top 0.61: C92.1 R74.1 v45.5,77.5 | J19.P$4 46.38,87.12 v46.5,87 46.5,84.5 47.05,83.95 U19.1
  Bottom 0.61: v46.5,87 45,87 43,85 43,80 v45.5,77.5
OUT19  (via drill 0.6)
  Top 0.61: C97.1 R78.1 v81.5,77.5 | J20.P$4 82.38,87.12 v82.5,87 82.5,84.5 83.05,83.95 U20.1
  Bottom 0.61: v82.5,87 81,87 79,85 79,80 v81.5,77.5
PWR  (via drill 0.6)
  Top 0.406: U1.5 15,12.95 C4.2
  Top 0.61: J1.P$2 15.46,18.54 16.05,17.95 C3.2 C4.2 C5.2 16.05,9.05 v16,9 | R3.1 7,11.05 7,12 8,13 v8.5,13
  Bottom 0.61: v8.5,13 v16,9
PWR1  (via drill 0.6)
  Top 0.406: U2.5 33,12.95 C9.2
  Top 0.61: J2.P$2 33.46,18.54 34.05,17.95 C8.2 C9.2 C10.2 34.05,9.05 v34,9 | R7.1 25,11.05 25,12 26,13 v26.5,13
  Bottom 0.61: v26.5,13 v34,9
PWR2  (via drill 0.6)
  Top 0.406: U3.5 69,12.95 C14.2
  Top 0.61: J3.P$2 69.46,18.54 70.05,17.95 C13.2 C14.2 C15.2 70.05,9.05 v70,9 | R11.1 61,11.05 61,12 62,13 v62.5,13
  Bottom 0.61: v62.5,13 v70,9
PWR3  (via drill 0.6)
  Top 0.406: U4.5 51,12.95 C19.2
  Top 0.61: J4.P$2 51.46,18.54 52.05,17.95 C18.2 C19.2 C20.2 52.05,9.05 v52,9 | R15.1 43,11.05 43,12 44,13 v44.5,13
  Bottom 0.61: v44.5,13 v52,9
PWR4  (via drill 0.6)
  Top 0.406: U5.5 87,12.95 C24.2
  Top 0.61: J5.P$2 87.46,18.54 88.05,17.95 C23.2 C24.2 C25.2 88.05,9.05 v88,9 | R19.1 79,11.05 79,12 80,13 v80.5,13
  Bottom 0.61: v80.5,13 v88,9
PWR5  (via drill 0.6)
  Top 0.406: U6.5 15,35.95 C29.2
  Top 0.61: J6.P$2 15.46,41.54 16.05,40.95 C28.2 C29.2 C30.2 16.05,32.05 v16,32 | R23.1 7,34.05 7,35 8,36 v8.5,36
  Bottom 0.61: v8.5,36 v16,32
PWR6  (via drill 0.6)
  Top 0.406: U7.5 33,35.95 C34.2
  Top 0.61: J7.P$2 33.46,41.54 34.05,40.95 C33.2 C34.2 C35.2 34.05,32.05 v34,32 | R27.1 25,34.05 25,35 26,36 v26.5,36
  Bottom 0.61: v26.5,36 v34,32
PWR7  (via drill 0.6)
  Top 0.406: U8.5 69,35.95 C39.2
  Top 0.61: J8.P$2 69.46,41.54 70.05,40.95 C38.2 C39.2 C40.2 70.05,32.05 v70,32 | R31.1 61,34.05 61,35 62,36 v62.5,36
  Bottom 0.61: v62.5,36 v70,32
PWR8  (via drill 0.6)
  Top 0.406: U9.5 51,35.95 C44.2
  Top 0.61: J9.P$2 51.46,41.54 52.05,40.95 C43.2 C44.2 C45.2 52.05,32.05 v52,32 | R35.1 43,34.05 43,35 44,36 v44.5,36
  Bottom 0.61: v44.5,36 v52,32
PWR9  (via drill 0.6)
  Top 0.406: U10.5 87,35.95 C49.2
  Top 0.61: J10.P$2 87.46,41.54 88.05,40.95 C48.2 C49.2 C50.2 88.05,32.05 v88,32 | R39.1 79,34.05 79,35 80,36 v80.5,36
  Bottom 0.61: v80.5,36 v88,32
PWR10  (via drill 0.6)
  Top 0.406: U11.5 15,59.95 C54.2
  Top 0.61: J11.P$2 15.46,65.54 16.05,64.95 C53.2 C54.2 C55.2 16.05,56.05 v16,56 | R43.1 7,58.05 7,59 8,60 v8.5,60
  Bottom 0.61: v8.5,60 v16,56
PWR11  (via drill 0.6)
  Top 0.406: U12.5 33,59.95 C59.2
  Top 0.61: J12.P$2 33.46,65.54 34.05,64.95 C58.2 C59.2 C60.2 34.05,56.05 v34,56 | R47.1 25,58.05 25,59 26,60 v26.5,60
  Bottom 0.61: v26.5,60 v34,56
PWR12  (via drill 0.6)
  Top 0.406: U13.5 69,59.95 C64.2
  Top 0.61: J13.P$2 69.46,65.54 70.05,64.95 C63.2 C64.2 C65.2 70.05,56.05 v70,56 | R51.1 61,58.05 61,59 62,60 v62.5,60
  Bottom 0.61: v62.5,60 v70,56
PWR13  (via drill 0.6)
  Top 0.406: U14.5 51,59.95 C69.2
  Top 0.61: J14.P$2 51.46,65.54 52.05,64.95 C68.2 C69.2 C70.2 52.05,56.05 v52,56 | R55.1 43,58.05 43,59 44,60 v44.5,60
  Bottom 0.61: v44.5,60 v52,56
PWR14  (via drill 0.6)
  Top 0.406: U15.5 87,59.95 C74.2
  Top 0.61: J15.P$2 87.46,65.54 88.05,64.95 C73.2 C74.2 C75.2 88.05,56.05 v88,56 | R59.1 79,58.05 79,59 80,60 v80.5,60
  Bottom 0.61: v80.5,60 v88,56
PWR15  (via drill 0.6)
  Top 0.406: U16.5 15,83.95 C79.2
  Top 0.61: J16.P$2 15.46,89.54 16.05,88.95 C78.2 C79.2 C80.2 16.05,80.05 v16,80 | R63.1 7,82.05 7,83 8,84 v8.5,84
  Bottom 0.61: v8.5,84 v16,80
PWR16  (via drill 0.6)
  Top 0.406: U17.5 33,83.95 C84.2
  Top 0.61: J17.P$2 33.46,89.54 34.05,88.95 C83.2 C84.2 C85.2 34.05,80.05 v34,80 | R67.1 25,82.05 25,83 26,84 v26.5,84
  Bottom 0.61: v26.5,84 v34,80
PWR17  (via drill 0.6)
  Top 0.406: U18.5 69,83.95 C89.2
  Top 0.61: J18.P$2 69.46,89.54 70.05,88.95 C88.2 C89.2 C90.2 70.05,80.05 v70,80 | R71.1 61,82.05 61,83 62,84 v62.5,84
  Bottom 0.61: v62.5,84 v70,80
PWR18  (via drill 0.6)
  Top 0.406: U19.5 51,83.95 C94.2
  Top 0.61: J19.P$2 51.46,89.54 52.05,88.95 C93.2 C94.2 C95.2 52.05,80.05 v52,80 | R75.1 43,82.05 43,83 44,84 v44.5,84
  Bottom 0.61: v44.5,84 v52,80
PWR19  (via drill 0.6)
  Top 0.406: U20.5 87,83.95 C99.2
  Top 0.61: J20.P$2 87.46,89.54 88.05,88.95 C98.2 C99.2 C100.2 88.05,80.05 v88,80 | R79.1 79,82.05 79,83 80,84 v80.5,84
  Bottom 0.61: v80.5,84 v88,80

## Text on the board
tPlace: miniPCB | miniPCB | miniPCB | miniPCB | miniPCB | miniPCB | miniPCB | miniPCB | miniPCB | miniPCB | miniPCB | miniPCB | miniPCB | miniPCB | miniPCB | miniPCB | miniPCB | miniPCB | miniPCB | miniPCB